# Altium PCB pmu_2.PcbDoc
Units mil, origin at the board's own origin, x right, y up, seen from the top; angles counter-clockwise.
Board outline 1870 x 900 mil, 2 copper layers (Top Layer, Bottom Layer); 15 components, 10 nets, 36 pads, 0 vias.
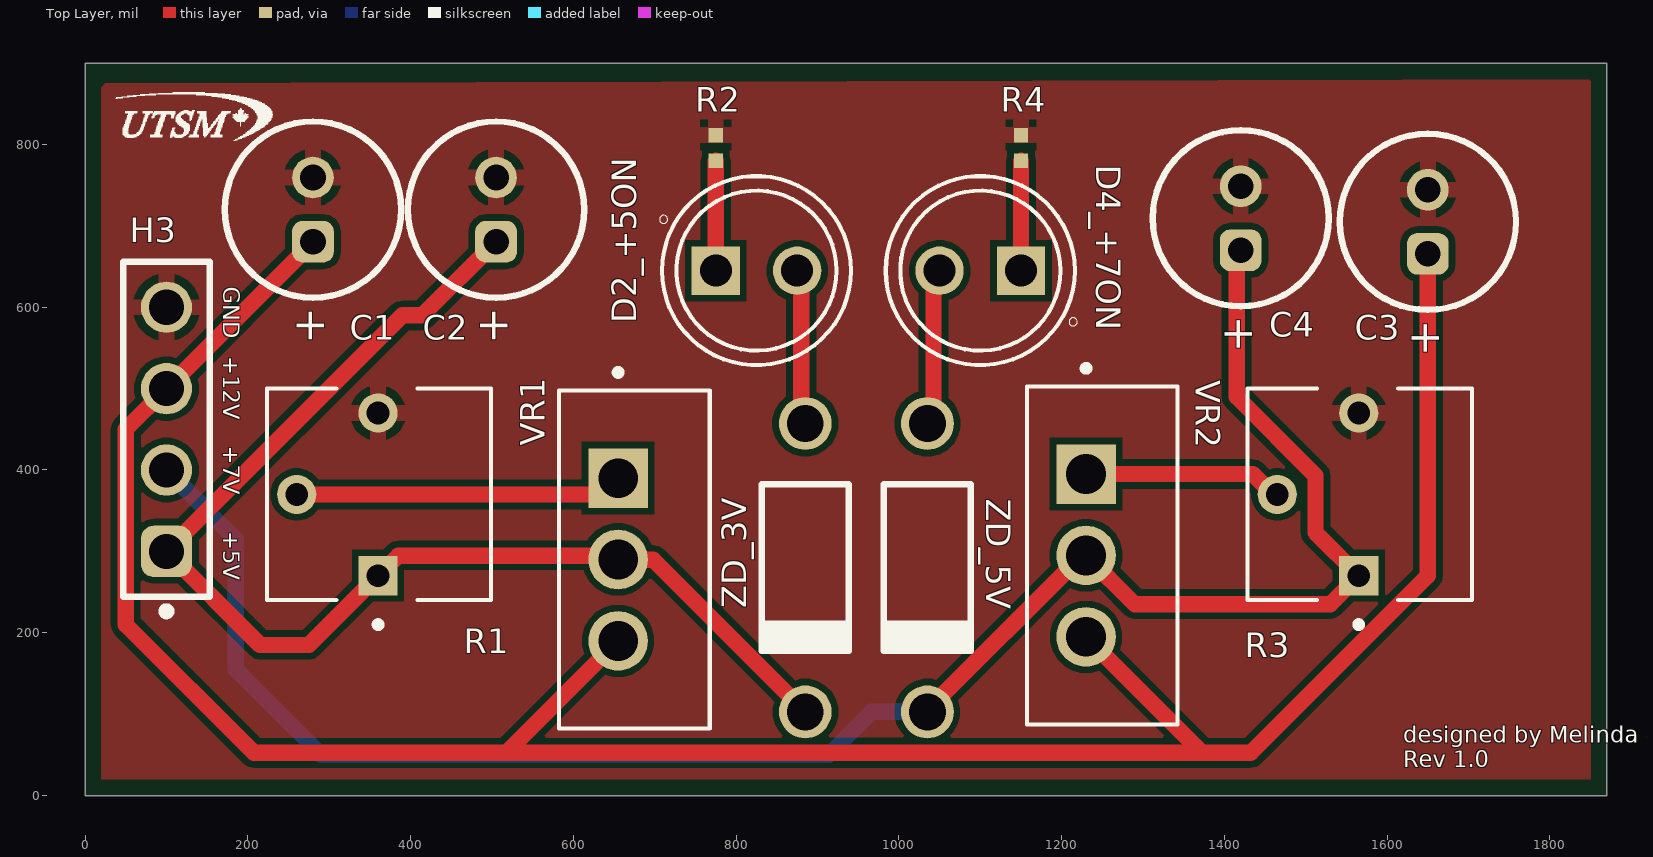
[diagram p0: Top Layer view]
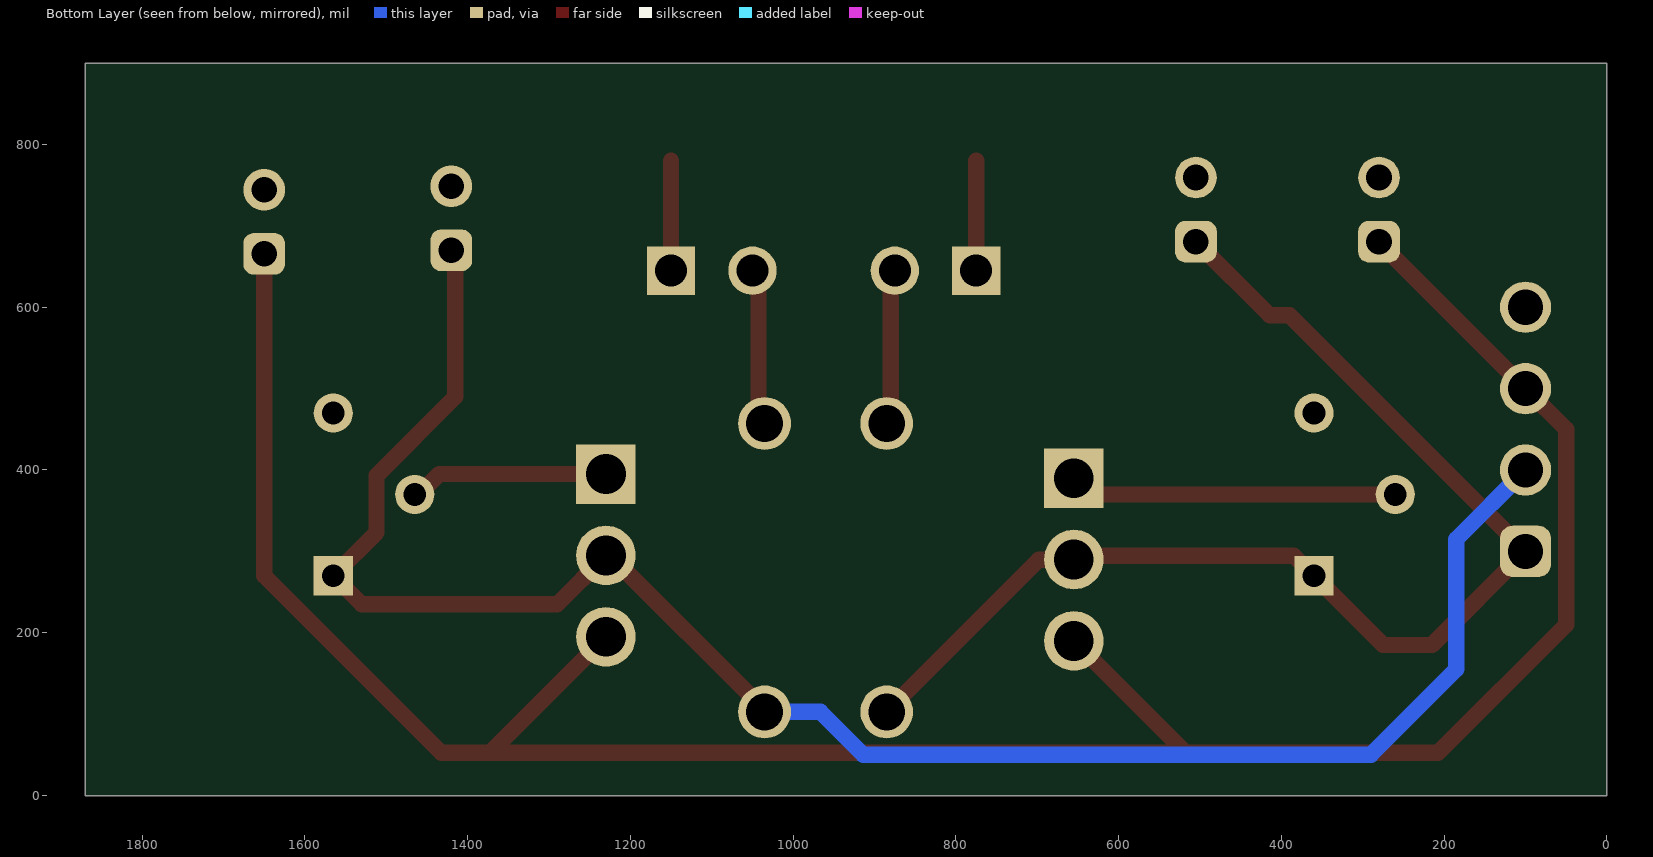
[diagram p1: Bottom Layer view, seen from below]
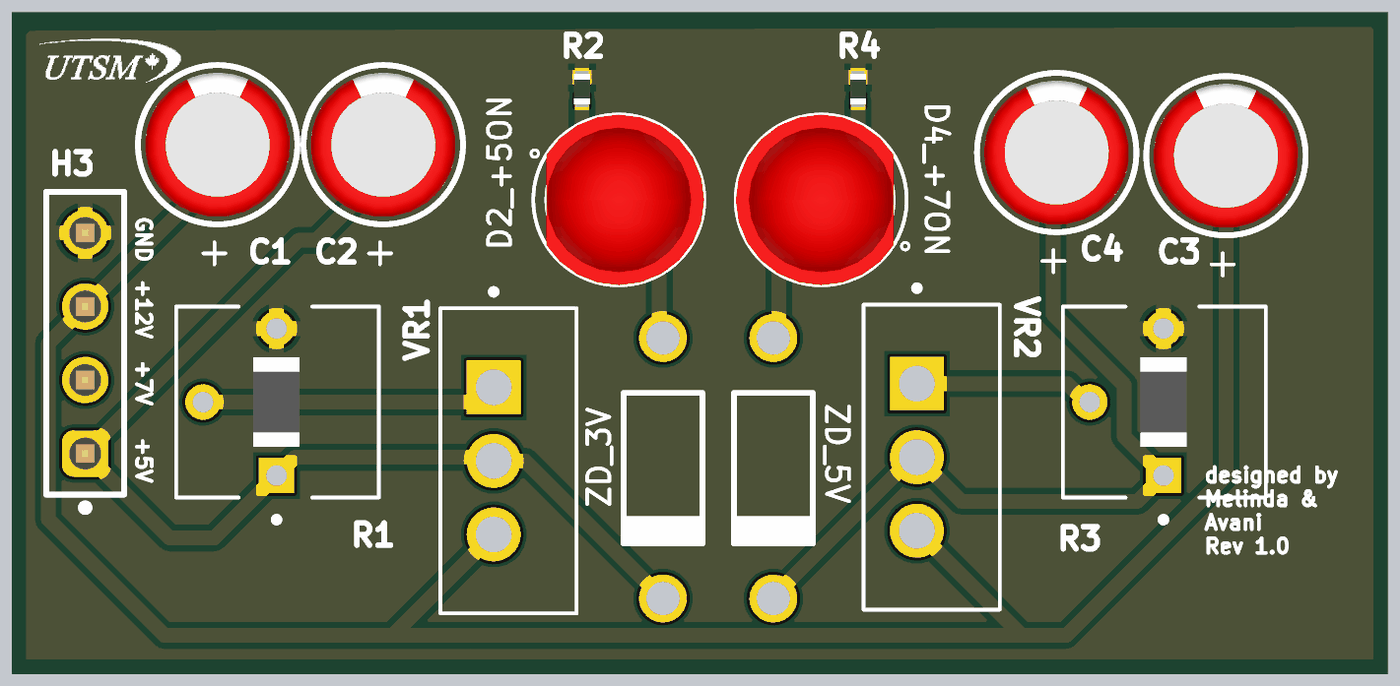
[diagram p2: 3D render of the assembled board from above, using the file's embedded part models]

## Layer stack, top to bottom
Top Solder: solder mask 0.4, Solder Resist, Dk 3.5
Top Layer: signal copper 1.4
Dielectric 1: dielectric 12.6, FR-4, Dk 4.8
Bottom Layer: signal copper 1.4
Bottom Solder: solder mask 0.4, Solder Resist, Dk 3.5

## Board outline
0,0 0,900 1870,900 1870,0

## Design rules (kind name [scope] priority, off if disabled: settings)
BoardOutlineClearance [All] p1: gap=11.81 ignorepadtopadclearanceinfootprint=FALSE except(15.75: Arc-SplitBarrior Arc-SplitContinuation Track-SplitBarrior Track-SplitContinuation SMDPad-SplitBarrior SMDPad-SplitContinuation THPad-SplitBarrior THPad-SplitContinuation Via-SplitBarrior Via-SplitContinuation Fill-SplitBarrior Fill-SplitContinuation Poly-SplitBarrior Poly-SplitContinuation Region-SplitBarrior Region-SplitContinuation Text-SplitBarrior Text-SplitContinuation)
Clearance "Clearance Different Nets" [All] p1: gap=7.87 ignorepadtopadclearanceinfootprint=FALSE except(3.5: Arc-Arc Arc-Track Arc-SMDPad Track-Track Track-SMDPad; 5: SMDPad-SMDPad SMDPad-Via THPad-Via Via-Via; 10: Arc-Via Arc-Text Track-Via Track-Text SMDPad-Text THPad-Text Via-Text Fill-Text Poly-Text Region-Text Text-Text; 19.68: THPad-THPad Via-Hole)
Clearance "Clearance Same Nets" [All] p2: gap=7.87 ignorepadtopadclearanceinfootprint=FALSE except(3.5: Arc-Arc Arc-Track Arc-SMDPad Track-Track Track-SMDPad SMDPad-SMDPad; 5: SMDPad-Via THPad-Via; 10: Arc-Via Arc-Text Track-Via Track-Text SMDPad-Text THPad-Text Via-Via Via-Text Fill-Text Poly-Text Region-Text Text-Text)
Clearance "Clearance Bottom Layer" [OnLayer('Bottom Layer')] p3: gap=8 ignorepadtopadclearanceinfootprint=TRUE except(10: Arc-Text Track-Text SMDPad-Text THPad-Text Via-Text Fill-Text Poly-Text Region-Text Text-Text)
Clearance "Clearance Top Layer" [OnLayer('Top Layer')] p4: gap=8 ignorepadtopadclearanceinfootprint=TRUE except(10: Arc-Text Track-Text SMDPad-Text THPad-Text Via-Text Fill-Text Poly-Text Region-Text Text-Text)
HoleSize [All] p1: absolutevalues=TRUE maxlimit=248.03 minlimit=7.87 maxpercent=80.000 minpercent=20.000
MinimumAnnularRing [All] p1: minimumring=5.12
MinimumSolderMaskSliver [All] p1: minsoldermaskwidth=3.94
PolygonConnect PolygonConnect_1 [All] p1: thpad.connectstyle=Relief thpad.reliefconductorwidth=20 thpad.reliefentries=4 thpad.polygonreliefangle="90 Angle" thpad.airgapwidth=10 smdpad.connectstyle=Relief smdpad.reliefconductorwidth=20 smdpad.reliefentries=4 smdpad.polygonreliefangle="90 Angle" smdpad.airgapwidth=10 via.connectstyle=Direct via.reliefconductorwidth=20 via.reliefentries=4 via.polygonreliefangle="90 Angle" via.airgapwidth=10
RoutingCorners [All] p1: cornerstyle=Round minsetback=100 maxsetback=100
RoutingVias [All] p1: holewidth=19.68 width=39.37 viastyle="Through Hole" minholewidth=7.87 minwidth=13.78 maxholewidth=39.37 maxwidth=78.74
SilkToSilkClearance [All] p1: silktosilkclearance=3.94
SilkToSolderMaskClearance [IsPad] p1: minsilkscreentomaskgap=3.94 clearancetoexposedcopper=TRUE
SolderMaskExpansion [All] p1: expansion=4 istentingtop=FALSE
SupplyNets "Schematic Supply Nets" [InNet('GND')] p1: voltage=0.000
Width [All] p1: maxlimit=100 minlimit=3.5 preferedwidth=15
25 further rules are at their usual default settings.

## Components (designator, comment, footprint, x,y, rotation, side; value= is the part's Value field where it differs from the comment)
C1 "2.2µF" WCAP-ATG5_D5H11 280,720 r270 top
C2 "1.1uF" WCAP-ATG5_D5H11 505,720 r270 top
C3 "2.2µF" WCAP-ATG5_D5H11 1650,705 r270 top
C4 "1.1uF" WCAP-ATG5_D5H11 1420,709.37 r270 top
D2_+5ON "WP7113ID" LED_WP7113ID 825,645 r0 top
D4_+7ON "WP7113ID" LED_WP7113ID 1100,645 r180 top
H3 "61300411121" 61300411121 100,450 r90 top
R1 "" TRIM_3362P-1-103LF 360,370 r90 top
R2 "ERJ2GE0R00X" RESC1005X40X25LL05T05 775,795.75 r270 top
R3 "" TRIM_3362P-1-103LF 1565,370 r90 top
R4 "ERJ2GE0R00X" RESC1005X40X25LL05T05 1150,795.75 r270 top
VR1 "LM317AT/NOPB" TO254P1054X470X1955-3 655,290 r270 top
VR2 "LM317AT/NOPB" TO254P1054X470X1955-3 1230,295 r270 top
ZD_3V "1N4742A" FAIR-DO-41-2_V 885,280 r270 top
ZD_5V "1N4742A" FAIR-DO-41-2_V 1035,280 r270 top

## Footprints (in the part's own frame and the unit in brackets; to place one, negate y for a bottom-side part, rotate by r counter-clockwise, add the part's x,y. Pads: shape width x height; smd on the part's side, far side on the other; paste and mask are expansions set on the pad)
61300411121 [mm] "Pin Header, pitch 2.54 mm, THT, Vertical, single row, 4p"
  rrect50% 1.6x1.6 hole 1.1: 1(-3.81,0)
  round 1.6 hole 1.1: 2(-1.27,0) 3(1.27,0) 4(3.81,0)
  silkscreen extent -5.8,-1.35 5.23,1.35, body extent -5.08,-1.27 5.08,1.27, height 8.57
FAIR-DO-41-2_V [mm] "2-Leads, Axial leaded, Body 2.72x5.2mm, Pin Spacing 9mm"
  round 1.65 hole 1.15: 1(-4.5,0) 2(4.5,0)
  silkscreen extent -2.6,-1.36 2.6,1.36, body extent -4.93,-1.36 4.93,1.36, height 2.71
LED_WP7113ID [mm]
  round 1.508 hole 1: A(1.27,0)
  rect 1.508x1.508 / inner round 1.508 / far side rect 1.508x1.508 hole 1: C(-1.27,0)
  silkscreen extent -3.03,-2.95 2.95,2.95, body extent -2.5,-2.95 2.95,2.95, height 9.6
RESC1005X40X25LL05T05 [mm] "Chip Resistor, 2-Leads, Body 1.05x0.55mm, IPC High Density"
  rect 0.45x0.45 smd: 1(-0.4,0) 2(0.4,0)
  body extent -0.53,-0.28 0.53,0.28, height 0.4
TO254P1054X470X1955-3 [mm]
  rect 1.86x1.86 hole 1.24: 1(-2.54,0)
  round 1.86 hole 1.24: 2(0,0) 3(2.54,0)
  silkscreen extent -5.94,-1.84 5.27,2.86
TRIM_3362P-1-103LF [mil]
  rect 48.11x48.11 hole 28.11: 1(-100,0)
  round 48.11 hole 28.11: 2(0,100) 3(100,0)
  silkscreen extent -164,-139 130,137, body extent -61,-31 61,31, height 26
WCAP-ATG5_D5H11 [mm] "Aluminum Electrolytic Capacitors, 5x11mm"
  rrect50% 1.3x1.3 hole 0.8: 1(1,0)
  round 1.3 hole 0.8: 2(-1,0)
  silkscreen extent -2.75,-2.75 2.75,2.75, body extent -2.49,-2.5 2.5,2.5, height 11.31

## Part data
C1 C3: library part 860020672006, "WCAP-ATG5 Aluminum Electrolytic Capacitor, Radial, THT, D5 x H11mm, 2.2µF, 50V", Capacitance Tolerance=+/-20%, Leakage Current=3µA, Manufacturer="Wurth Elektronik", Operating Temperature Max=105°C, Operating Temperature Min=-40°C, Rated Voltage (DC)=50V, Ripple Current=20mA, Capacitance=2.2µF, Category="Aluminum Electrolytic Capacitors", ComponentLink1Description="Website Link", ComponentLink1URL=https://www.we-online.com/redexpert/article/860020672006?ad, ComponentLink2Description="Datasheet Link", ComponentLink2URL=https://www.we-online.com/redexpert/spec/860020672006?ad, Diameter=5mm, Dissipation Factor=10%, Endurance=2000h, Height=11mm, Manufacturer Part Number=860020672006, Match Code=WCAP-ATG5, Mount="Through Hole", Packaging="Ammo Pack", Technical Reference=ATDC1102R2M050DSPA3B000
C2 C4: library part 860020672006, "WCAP-ATG5 Aluminum Electrolytic Capacitor, Radial, THT, D5 x H11mm, 2.2µF, 50V", Capacitance=2.2µF, Capacitance Tolerance=+/-20%, Leakage Current=3µA, Manufacturer="Wurth Elektronik", Operating Temperature Max=105°C, Operating Temperature Min=-40°C, Rated Voltage (DC)=50V, Ripple Current=20mA, Category="Aluminum Electrolytic Capacitors", ComponentLink1Description="Website Link", ComponentLink1URL=https://www.we-online.com/redexpert/article/860020672006?ad, ComponentLink2Description="Datasheet Link", ComponentLink2URL=https://www.we-online.com/redexpert/spec/860020672006?ad, Diameter=5mm, Dissipation Factor=10%, Endurance=2000h, Height=11mm, Manufacturer Part Number=860020672006, Match Code=WCAP-ATG5, Mount="Through Hole", Packaging="Ammo Pack", Technical Reference=ATDC1102R2M050DSPA3B000
D2_+5ON D4_+7ON: "Red 617nm LED Indication - Discrete 2V Radial", Package="Radial Kingbright", Availability="In Stock", Check_prices=https://www.snapeda.com/parts/WP7113ID/Kingbright/view-part/?ref=eda, MF=Kingbright, MP=WP7113ID, Price=None, Purchase-URL=https://pricing.snapeda.com/search/part/WP7113ID/?ref=eda, SnapEDA_Link=https://www.snapeda.com/parts/WP7113ID/Kingbright/view-part/?ref=snap
H3: "WR-PHD Pin Header, THT, Vertical, pitch 2.54mm, 1 Row, 4P", Contact Resistance=20mOhm, Manufacturer="Wurth Elektronik", Operating Temperature Max=105°C, Operating Temperature Min=-40°C, Rated Current=3A, Withstanding Voltage=500V, Working Voltage=250V, Category="Board-to-Board Connectors", ComponentLink1Description="Website Link", ComponentLink1URL=https://www.we-online.com/redexpert/article/61300411121?ad, ComponentLink2Description="Datasheet Link", ComponentLink2URL=https://www.we-online.com/redexpert/spec/61300411121?ad, Gender="Pin Header", Manufacturer Part Number=61300411121, Match Code=WR-PHD, Mount="Through Hole", Number of Pins=4, Number of Rows=1, Orientation=Vertical, Packaging=Bag, Pitch=2.54mm
R1 R3: library part 3362P-1-103LF, "10 kOhms 0.5W, 1/2W PC Pins Through Hole Trimmer Potentiometer Cermet 1 Turn Top Adjustment", Package="3116 Bourns", Check_prices=https://www.snapeda.com/parts/3362P-1-103LF/Bourns/view-part/13764/?ref=eda, Digi-Key_Part_Number=3362P-103LF-ND, MF=Bourns, MP=3362P-1-103LF, Purchase-URL=https://pricing.snapeda.com/search/part/3362P-1-103LF/?ref=eda, SnapEDA_Link=https://www.snapeda.com/parts/3362P-1-103LF/Bourns/view-part/13764/?ref=snap
R2 R4: library part CMP-2000-07451-1, "Chip Resistor, 0 Ohm, 0.1 W, -55 to 155 degC, 0402 (1005 Metric), RoHS, Tape and Reel", Case Code (Imperial)=0402, Case Code (Metric)=1005, Manufacturer=Panasonic, Max Operating Temperature=155degC, Max Power Dissipation=100mW, Min Operating Temperature=-55degC, Package Description="2-Pin Surface Mount Device, Body 1 x 0.5 mm", Package Quantity=1, Package Reference=402, Resistance=0mOhm, Temperature Coefficient=600ppm/��C, Tolerance=5%, Voltage Rating=50V, Case/Package=0402, Composition=ThickFilm, Contact Plating=Tin, Datasheet URL=https://industrial.panasonic.com/cdbs/www-data/pdf/RDA0000/AOA0000C301.pdf, Datasheet Version=03/2015, Depth=0.5mm, Height=0.35mm, Lead Free=LeadFree, Length=1mm, Manufacturer URL=http://www.panasonic.com/, Military Standard=Not, Mount=SurfaceMount, Mounting Technology=SurfaceMount, Number of Terminations=2, Packaging=TapeandReel, Power Rating=100mW, Radiation Hardening=No, REACH SVHC=NoSVHC, RoHSCompliant=True, Termination=SMD/SMT, Voltage Rating (DC)=50V, Width=0.02inch
VR1 VR2: Package=None, Availability=Unavailable, MP=LM317AT/NOPB, Price=None
ZD_3V ZD_5V: library part CMP-0892-00001-1, "Zener Diode, 12V, 1W, 5%, -65 to 200 degC, 2-Pin DO-41, Body 2.72 x 5.2 mm, RoHS", Manufacturer="Fairchild Semiconductor", Operating and Storage Temperature Range="-65 to 200 degC", Test Current IZ (mA)=21, Tolerance=5%, ComponentLink1Description="Manufacturer URL", ComponentLink1URL=http://www.fairchildsemi.com/, ComponentLink2Description=Datasheet, ComponentLink2URL=http://www.fairchildsemi.com/ds/1N/1N4744A.pdf, ComponentLink3Description="Package Specification", ComponentLink3URL=http://www.fairchildsemi.com/dwg/DO/DO41A.pdf, DatasheetVersion="Rev. H3", IR (uA)=5, Mounting Technology="Through Hole", PackageDescription="2-Pin Axial leaded, Body 2.72 x 5.2 mm, Lead Spread 25.4 mm", PackageReference=DO-41-2, PackageVersion="Rev. 2", PartNumber=1N4742A, PD (W)=1, RoHS=TRUE, VZ (Max.) (V)=12.6, VZ (Min.) (V)=11.4, ZZ (Max) (ohm)=8

## Nets (pads, with @x,y where several pads share a name; then routed paths per layer and width w, separated by ;. In a path a pad name is that pad's centre, name@x,y a point inside that pad or via, vN(x,y) a via of type N, cw(c..) or ccw(c..) an arc to the next point about the centre after c; other vN are vias at no path point)
+5V: C2.1 H3.1 R1.1 VR1.2 ZD_3V.2 | length 1520.3
  Top Layer w20: C2.1 414.37,590 390,590 H3.1 215,185 275,185 R1.1 384.78,294.78 650.22,294.78 VR1.2 655.4,289.6 698.23,289.6 ZD_3V.2
+7V: C4.1 H3.2 R3.1 VR2.2 ZD_5V.2 | length 2310.1
  Top Layer w20: ZD_5V.2 1035,105.09 1224.91,295 VR2.2 1290,235 1530,235 R3.1 1511.8,323.2 1511.8,393.2 1415,490 1415,665 C4.1
  Bottom Layer w20: H3.2 185,315 185,155 290,50 913.64,50 966.47,102.83 ZD_5V.2
+12V: C1.1 C3.1 H3.3 VR1.3 VR2.3 | length 3112.9
  Top Layer w20: C1.1 280,680 H3.3 50,450 50,210 207.52,52.48 517.48,52.48 ; VR1.3 517.48,52.48 ; VR2.3 1372.52,52.48 ; C3.1 1650,270 1432.48,52.48 1372.52,52.48 ; 517.48,52.48 1372.52,52.48
GND: C1.2 C2.2 C3.2 C4.2 H3.4 R1.3 R2.1 R3.3 R4.1 | length 22.7
  Top Layer w10: R1.3 R1.3@364.06,474.06
  Top Layer w15: C1.2 C1.2@289.37,759.37
  Top Layer w20: R3.3 R3.3@1565,477.61
NetD2_+5ON_A: D2_+5ON.A ZD_3V.1 | length 202.6
  Top Layer w15: D2_+5ON.A@875,634.35 D2_+5ON.A D2_+5ON.A@880,640 ; ZD_3V.1@880,462.17 ZD_3V.1
  Top Layer w20: ZD_3V.1@880,462.17 D2_+5ON.A@880,640
NetD2_+5ON_C: D2_+5ON.C R2.2 | length 135
  Top Layer w20: D2_+5ON.C R2.2
NetD4_+7ON_A: D4_+7ON.A ZD_5V.1 | length 204.7
  Top Layer w15: ZD_5V.1 ZD_5V.1@1042.5,464.67 ; D4_+7ON.A@1042.5,637.5 D4_+7ON.A
  Top Layer w20: ZD_5V.1@1042.5,464.67 D4_+7ON.A@1042.5,637.5 ; D4_+7ON.A@1050,634.35 D4_+7ON.A
NetD4_+7ON_C: D4_+7ON.C R4.2 | length 135
  Top Layer w20: D4_+7ON.C R4.2
NetR1_2: R1.2 VR1.1 | length 403.3
  Top Layer w15: VR1.1@635,370 VR1.1
  Top Layer w20: R1.2 VR1.1@635,370
NetR3_2: R3.2 VR2.1 | length 245.4
  Top Layer w10: R3.2@1459.77,370 R3.2
  Top Layer w20: VR2.1 1434.77,395 R3.2@1459.77,370

## Polygon pours and split planes (outlines as drawn)
GND on Top Layer "GND_L01_P000" (solid, pour order 0): 25,875 20,870 20,20 1850,20 1850,440 1850,880

## Silkscreen, mask and mechanical layers (free items; w line width, h text height)
Top Overlay:
  drawing of 7 lines, arcs and shapes, not listed
  text "GND" at 170,625 h20 r270
  text "+12V" at 170,540 h20 r270
  text "+7V" at 170,430 h20 r270
  text "+5V" at 170,325 h20 r270
  text "designed by Melinda & Avani / Rev 1.0" at 1620,35 h20
Mechanical 1:
  the board outline again, w10

## Text inside footprints (layer, text, board x,y; h text height)
C1: Top Overlay "+" at 260.32,599.92 h39.37 r270
C2: Top Overlay "+" at 485.32,599.92 h39.37 r270
C3: Top Overlay "+" at 1630.32,584.92 h39.37 r270
C4: Top Overlay "+" at 1400.32,589.29 h39.37 r270